# Altium PCB ACH512识别升级仪V1.2_20260608.PcbDoc (part 4 of 6)
Units mil, origin at the board's own origin, x right, y up, seen from the top; angles counter-clockwise.
Board outline 6141.73 x 5401.57 mil, 2 copper layers (Top Layer, Bottom Layer); 157 components, 111 nets, 548 pads, 222 vias.
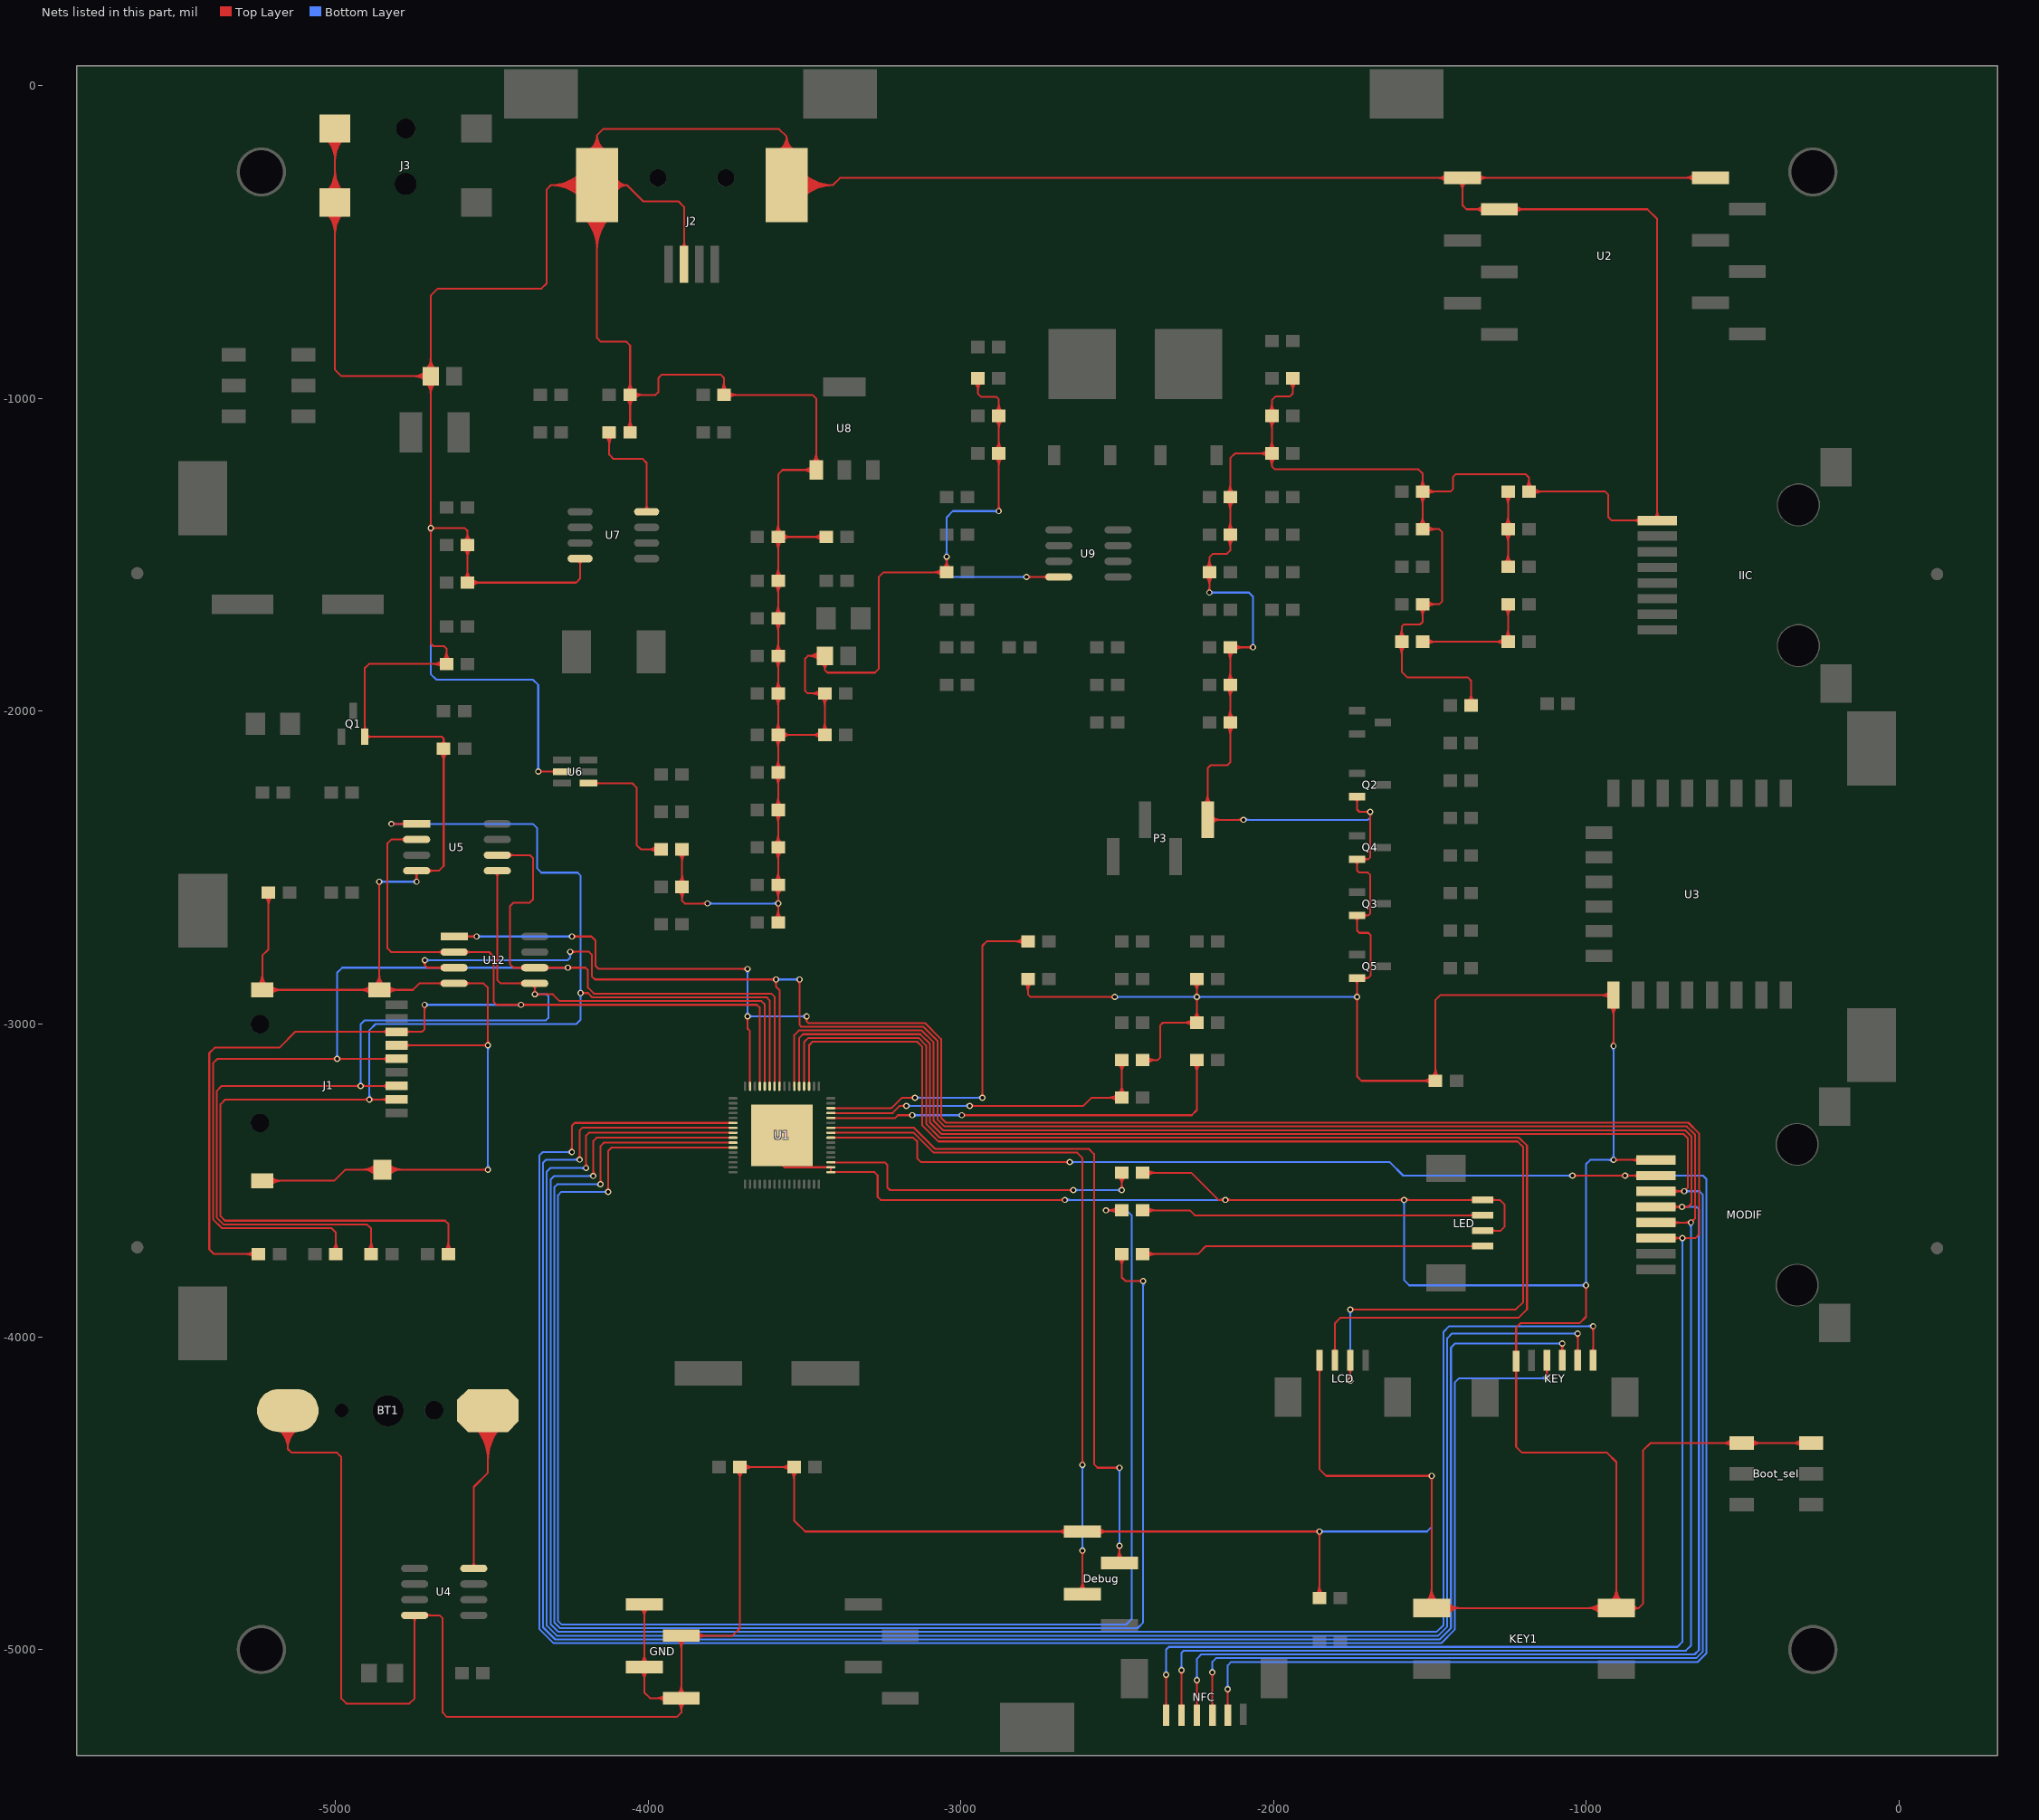
[diagram p4: the nets of this part, all layers, seen from the top]

## Via types
v1: diameter 19.68, hole 11.81, Top Layer to Bottom Layer, 222 vias

## Nets (pads, with @x,y where several pads share a name; then routed paths per layer and width w, separated by ;. In a path a pad name is that pad's centre, name@x,y a point inside that pad or via, vN(x,y) a via of type N, cw(c..) or ccw(c..) an arc to the next point about the centre after c; other vN are vias at no path point) (continued)
GND: (continued)
  Top Layer w6: KEY1.2@-850.44,-4856.27 ccw(c-832.59,-4847.86) -832.59,-4867.59 ; MODIF.8@-833.67,-3443.05 ccw(c-854.09,-3463.47) -854.09,-3434.59 ccw(c-854.09,-3405.71) MODIF.8@-833.67,-3426.13 ; IIC.8@-829.48,-1398.46 ccw(c-849.9,-1418.88) -849.9,-1390 ccw(c-849.9,-1361.12) IIC.8@-829.48,-1381.54 ; IIC.8@-781.84,-1381.54 ccw(c-802.26,-1361.12) -773.39,-1361.12 ccw(c-744.51,-1361.12) IIC.8@-764.93,-1381.54 ; U2.7@-654.41,-306.08 ccw(c-683.56,-335.23) -683.56,-294 ccw(c-683.56,-252.77) U2.7@-654.41,-281.92 ; U2.7@-650.16,-301.83 ccw(c-669.08,-320.75) -669.08,-294 ccw(c-669.08,-267.25) U2.7@-650.16,-286.17 ; Boot_sel.3@-533.17,-4352.93 ccw(c-565.02,-4384.77) -565.02,-4339.74 ccw(c-565.02,-4294.71) Boot_sel.3@-533.17,-4326.55 ; Boot_sel.3@-528.93,-4348.69 ccw(c-550.53,-4370.29) -550.53,-4339.74 ccw(c-550.53,-4309.19) Boot_sel.3@-528.93,-4330.79 ; Boot_sel.3@-477.57,-4348.69 cw(c-455.97,-4370.29) -455.97,-4339.74 cw(c-455.97,-4309.19) Boot_sel.3@-477.57,-4330.79 ; Boot_sel.3@-473.33,-4352.93 cw(c-441.48,-4384.77) -441.48,-4339.74 cw(c-441.48,-4294.71) Boot_sel.3@-473.33,-4326.55 ; Boot_sel.3@-310.73,-4352.93 ccw(c-342.58,-4384.77) -342.58,-4339.74 ccw(c-342.58,-4294.71) Boot_sel.3@-310.73,-4326.55 ; Boot_sel.3@-306.49,-4348.69 ccw(c-328.09,-4370.29) -328.09,-4339.74 ccw(c-328.09,-4309.19) Boot_sel.3@-306.49,-4330.79 ; Boot_sel.3@-280.81,-4339.74 Boot_sel.3@-503.25,-4339.74 -794.74,-4339.74 -819,-4364 -819,-4854 -832.59,-4867.59 ; -5151.87,-4358.53 -5139.81,-4370.59 -4994.81,-4370.59 -4980.81,-4384.59 -4980.81,-5156.59 -4964.81,-5172.59 -4762.81,-5172.59 -4746.3,-5156.08 U4.4@-4746.3,-4890.59 -4666.81,-4890.59 -4656.81,-4900.59 -4656.81,-5201.59 -4642.81,-5215.59 -3907.81,-5215.59 -3893.7,-5201.48 GND.4@-3893.7,-5155.59 ; v1(-4694.81,-1414.59) C15.2@-4694.81,-928.59 ; v1(-4694.81,-1414.59) -4694.81,-1783.19 -4686,-1792 -4652,-1792 -4644.27,-1799.73 R18.2@-4644.27,-1848.59 -4892.59,-1848.59 -4905.43,-1861.43 Q1.2@-4905.43,-2081.34 -4659.66,-2081.34 -4653.46,-2087.54 ; C15.2@-4694.81,-928.59 -4694.81,-671.59 -4671.81,-648.59 -4340.81,-648.59 -4323.81,-631.59 -4323.81,-331.59 -4310.01,-317.79 ; -4310.01,-317.79 J2.6@-4163.15,-317.79 ; J2.6@-4163.15,-317.79 -4067.61,-317.79 ; J2.6@-4163.15,-317.79 -4163.15,-806.25 -4150.81,-818.59 -4068.81,-818.59 -4057.35,-830.05 D3.2@-4057.35,-988.59 ; J2.6@-4163.15,-317.79 -4163.15,-157.93 ; -4163.15,-157.93 -4143.81,-138.59 -3580.81,-138.59 -3556.85,-162.55 ; D3.2@-4057.35,-988.59 -3975.81,-988.59 -3966.81,-979.59 -3966.81,-934.59 -3955.81,-923.59 -3767.81,-923.59 -3757.35,-934.05 R17.1@-3757.35,-988.59 -3473.81,-988.59 -3462.36,-1000.04 U8.1@-3462.36,-1228.46 -3569.68,-1228.46 -3583.81,-1242.59 C26.2@-3583.81,-1442.59 ; C4.1@-3583.81,-2075.59 C22.2@-3583.81,-1942.59 C23.2@-3583.81,-1822.59 C24.2@-3583.81,-1702.59 C25.2@-3583.81,-1582.59 C26.2@-3583.81,-1442.59 ; C4.1@-3583.81,-2075.59 C7.1@-3434.67,-2075.59 C6.1@-3434.67,-1942.59 -3489.81,-1942.59 -3497.81,-1934.59 -3497.81,-1831.59 -3488.81,-1822.59 ; -3556.85,-162.55 J2.5@-3556.85,-317.79 -3409.01,-317.79 ; -3488.81,-1822.59 C19.2@-3434.68,-1822.59 -3434.68,-1867.72 ; -3409.01,-317.79 -3386.22,-295 U2.1@-1395.98,-295 -1395.98,-382.42 -1383.4,-395 U2.2@-1277.87,-395 -804.4,-395 -773.39,-426.01 IIC.8@-773.39,-1390 -919.4,-1390 -929.81,-1379.59 -929.81,-1307.59 -939.81,-1297.59 C28.2@-1183.35,-1297.59 -1183.35,-1253.05 -1194.81,-1241.59 -1416.81,-1241.59 -1425.81,-1250.59 -1425.81,-1289.59 -1433.81,-1297.59 C30.2@-1523.35,-1297.59 ; C46.2@-2005.27,-1175.59 -2005.27,-1217.13 -1995.81,-1226.59 -1536.81,-1226.59 -1523.35,-1240.05 C30.2@-1523.35,-1297.59 ; KEY1.2@-903.96,-4867.59 -832.59,-4867.59
  Bottom Layer w6: v1(-4859.36,-2545) v1(-4740,-2545) ; v1@-4854.52,-2549.84 cw(c-4842.84,-2561.52) -4842.84,-2545 cw(c-4842.84,-2528.48) v1@-4854.52,-2540.16 ; v1@-4744.84,-2549.84 ccw(c-4756.52,-2561.52) -4756.52,-2545 ccw(c-4756.52,-2528.48) v1@-4744.84,-2540.16 ; v1@-4699.65,-1419.43 cw(c-4711.33,-1431.11) -4694.81,-1431.11 cw(c-4678.29,-1431.11) v1@-4689.97,-1419.43 ; v1(-4694.81,-1414.59) -4694.81,-1880.59 -4676.31,-1899.09 -4367.91,-1899.09 -4351.09,-1915.91 v1(-4351.09,-2192.91) ; v1@-4516.65,-3460.85 ccw(c-4528.33,-3449.17) -4511.81,-3449.17 ccw(c-4495.29,-3449.17) v1@-4506.97,-3460.85 ; v1@-4516.65,-3072.89 cw(c-4528.33,-3084.57) -4511.81,-3084.57 cw(c-4495.29,-3084.57) v1@-4506.97,-3072.89 ; v1(-4511.81,-3465.69) v1(-4511.81,-3068.05) ; v1@-4355.93,-2188.07 ccw(c-4367.61,-2176.39) -4351.09,-2176.39 ccw(c-4334.57,-2176.39) v1@-4346.25,-2188.07 ; v1(-3809.81,-2614.59) v1(-3583.81,-2614.59) ; v1@-3804.97,-2619.43 cw(c-3793.29,-2631.11) -3793.29,-2614.59 cw(c-3793.29,-2598.07) v1@-3804.97,-2609.75 ; v1@-3588.65,-2619.43 ccw(c-3600.33,-2631.11) -3600.33,-2614.59 ccw(c-3600.33,-2598.07) v1@-3588.65,-2609.75 ; v1@-3050.11,-1510.89 cw(c-3061.79,-1522.57) -3045.27,-1522.57 cw(c-3028.76,-1522.57) v1@-3040.44,-1510.89 ; v1@-3050.11,-1501.22 ccw(c-3061.79,-1489.54) -3045.27,-1489.54 ccw(c-3028.76,-1489.54) v1@-3040.44,-1501.22 ; v1@-2883.18,-1364.96 ccw(c-2894.86,-1376.64) -2894.86,-1360.13 ccw(c-2894.86,-1343.61) v1@-2883.18,-1355.29 ; v1(-2878.35,-1360.13) -3025.35,-1360.13 -3045.27,-1380.05 v1(-3045.27,-1506.05) -3045.27,-1560.13 -3034.81,-1570.59 v1(-2789.81,-1570.59) ; v1@-2794.65,-1575.43 ccw(c-2806.33,-1587.11) -2806.33,-1570.59 ccw(c-2806.33,-1554.07) v1@-2794.65,-1565.75 ; v1(-2667.07,-3562.33) v1(-2153.81,-3562.33) ; v1@-2662.23,-3567.17 cw(c-2650.55,-3578.85) -2650.55,-3562.33 cw(c-2650.55,-3545.81) v1@-2662.23,-3557.49 ; v1(-2507.81,-2913.59) v1(-2245.27,-2913.59) v1(-1733.15,-2913.59) ; v1@-2502.97,-2918.43 cw(c-2491.29,-2930.11) -2491.29,-2913.59 cw(c-2491.29,-2897.07) v1@-2502.97,-2908.75 ; v1@-2250.11,-2918.43 ccw(c-2261.79,-2930.11) -2261.79,-2913.59 ccw(c-2261.79,-2897.07) v1@-2250.11,-2908.75 ; v1@-2240.44,-2918.43 cw(c-2228.76,-2930.11) -2228.76,-2913.59 cw(c-2228.76,-2897.07) v1@-2240.44,-2908.75 ; v1(-2205.27,-1620.59) -2078.81,-1620.59 -2065.81,-1633.59 v1(-2065.81,-1795.59) ; v1@-2200.44,-1625.43 cw(c-2188.76,-1637.11) -2188.76,-1620.59 cw(c-2188.76,-1604.07) v1@-2200.44,-1615.75 ; v1@-2158.65,-3567.17 ccw(c-2170.33,-3578.85) -2170.33,-3562.33 ccw(c-2170.33,-3545.81) v1@-2158.65,-3557.49 ; v1(-2096.4,-2347) -1698.22,-2347 -1690.81,-2339.59 v1(-1690.81,-2321.59) ; v1@-2091.56,-2351.84 cw(c-2079.88,-2363.52) -2079.88,-2347 cw(c-2079.88,-2330.48) v1@-2091.56,-2342.16 ; v1@-2070.65,-1790.75 ccw(c-2082.33,-1779.07) -2065.81,-1779.07 ccw(c-2049.29,-1779.07) v1@-2060.97,-1790.75 ; v1(-1853.27,-4622.72) -1508.94,-4622.72 -1494.51,-4608.29 v1(-1494.51,-4444.59) ; v1@-1848.44,-4627.55 cw(c-1836.76,-4639.24) -1836.76,-4622.72 cw(c-1836.76,-4606.2) v1@-1848.44,-4617.88 ; v1@-1737.99,-2918.43 ccw(c-1749.67,-2930.11) -1749.67,-2913.59 ccw(c-1749.67,-2897.07) v1@-1737.99,-2908.75 ; v1@-1695.65,-2326.43 cw(c-1707.33,-2338.11) -1690.81,-2338.11 cw(c-1674.29,-2338.11) v1@-1685.97,-2326.43 ; v1@-1587.65,-3567.17 cw(c-1599.33,-3578.85) -1582.81,-3578.85 cw(c-1566.29,-3578.85) v1@-1577.97,-3567.17 ; v1(-1582.81,-3562.33) -1582.81,-3818.59 -1565.81,-3835.59 v1(-1001,-3835.59) -1001,-3448 -987.59,-3434.59 v1(-913.23,-3434.59) v1(-913.23,-3070.17) ; v1@-1499.35,-4449.43 cw(c-1511.03,-4461.11) -1494.51,-4461.11 cw(c-1477.99,-4461.11) v1@-1489.67,-4449.43 ; v1@-1005.84,-3840.43 ccw(c-1017.52,-3852.11) -1017.52,-3835.59 ccw(c-1017.52,-3819.07) -1005.84,-3830.75 ccw(c-1017.52,-3819.07) -1001,-3819.07 ccw(c-984.48,-3819.07) v1@-996.16,-3830.75 ; v1@-918.07,-3439.43 ccw(c-929.75,-3451.11) -929.75,-3434.59 ccw(c-929.75,-3418.07) -918.07,-3429.75 ccw(c-929.75,-3418.07) -913.23,-3418.07 ccw(c-896.71,-3418.07) v1@-908.39,-3429.75 ; v1@-918.07,-3075.01 cw(c-929.75,-3086.69) -913.23,-3086.69 cw(c-896.71,-3086.69) v1@-908.39,-3075.01
I2C_SCL: C27.2 R20.1 R22.1 | length 808.2
  Top Layer w6: C27.2@-1523.35,-1777.59 R20.1@-1250.27,-1777.59 R22.1@-1250.27,-1657.59 ; C27.2@-1513.82,-1785.15 cw(c-1495.58,-1803.39) -1495.58,-1777.59 cw(c-1495.58,-1751.79) C27.2@-1513.82,-1770.03 ; C27.2@-1509.58,-1789.39 cw(c-1481.1,-1817.87) -1481.1,-1777.59 cw(c-1481.1,-1737.31) C27.2@-1509.58,-1765.79 ; R20.1@-1264.04,-1789.39 ccw(c-1292.52,-1817.87) -1292.52,-1777.59 ccw(c-1292.52,-1737.31) R20.1@-1264.04,-1765.79 ; R20.1@-1262.07,-1765.79 ccw(c-1290.56,-1737.31) -1250.27,-1737.31 ccw(c-1209.99,-1737.31) R20.1@-1238.48,-1765.79 ; R22.1@-1262.07,-1669.39 cw(c-1290.56,-1697.87) -1250.27,-1697.87 cw(c-1209.99,-1697.87) R22.1@-1238.48,-1669.39 ; R20.1@-1259.8,-1785.15 ccw(c-1278.04,-1803.39) -1278.04,-1777.59 ccw(c-1278.04,-1751.79) R20.1@-1259.8,-1770.03 ; R20.1@-1257.83,-1770.03 ccw(c-1276.07,-1751.79) -1250.27,-1751.79 ccw(c-1224.48,-1751.79) R20.1@-1242.72,-1770.03 ; R22.1@-1257.83,-1665.15 cw(c-1276.07,-1683.39) -1250.27,-1683.39 cw(c-1224.48,-1683.39) R22.1@-1242.72,-1665.15
I2C_SDA: C28.1 R21.1 R23.2 | length 655.2
  Top Layer w6: R23.2@-1262.07,-1525.79 ccw(c-1290.56,-1497.31) -1250.27,-1497.31 ccw(c-1209.99,-1497.31) R23.2@-1238.48,-1525.79 ; R21.1@-1262.07,-1429.39 cw(c-1290.56,-1457.87) -1250.27,-1457.87 cw(c-1209.99,-1457.87) R21.1@-1238.48,-1429.39 ; R21.1@-1262.07,-1405.79 ccw(c-1290.56,-1377.31) -1250.27,-1377.31 ccw(c-1209.99,-1377.31) R21.1@-1238.48,-1405.79 ; C28.1@-1262.07,-1309.39 cw(c-1290.56,-1337.87) -1250.27,-1337.87 cw(c-1209.99,-1337.87) C28.1@-1238.48,-1309.39 ; R23.2@-1257.83,-1530.03 ccw(c-1276.07,-1511.79) -1250.27,-1511.79 ccw(c-1224.48,-1511.79) R23.2@-1242.72,-1530.03 ; R21.1@-1257.83,-1425.15 cw(c-1276.07,-1443.39) -1250.27,-1443.39 cw(c-1224.48,-1443.39) R21.1@-1242.72,-1425.15 ; R21.1@-1257.83,-1410.03 ccw(c-1276.07,-1391.79) -1250.27,-1391.79 ccw(c-1224.48,-1391.79) R21.1@-1242.72,-1410.03 ; C28.1@-1257.83,-1305.15 cw(c-1276.07,-1323.39) -1250.27,-1323.39 cw(c-1224.48,-1323.39) C28.1@-1242.72,-1305.15 ; R23.2@-1250.27,-1537.59 R21.1@-1250.27,-1417.59 C28.1@-1250.27,-1297.59
KEY1: KEY.4 U1.6 | length 6469
  Top Layer w6: v1@-4248.65,-3404.75 ccw(c-4260.33,-3393.07) -4243.81,-3393.07 ccw(c-4227.29,-3393.07) v1@-4238.97,-3404.75 ; v1(-4243.81,-3409.59) -4243.81,-3325.59 -4234.44,-3316.22 U1.6@-3728.31,-3316.22 ; KEY.4@-1131.46,-4103.59 cw(c-1144.49,-4116.61) -1126.07,-4116.61 cw(c-1107.65,-4116.61) KEY.4@-1120.67,-4103.59 ; v1@-1130.91,-4127.49 ccw(c-1142.59,-4115.81) -1126.07,-4115.81 ccw(c-1109.55,-4115.81) v1@-1121.23,-4127.49 ; v1(-1126.07,-4132.33) KEY.4@-1126.07,-4075.36
  Bottom Layer w6: v1@-4248.65,-3414.43 ccw(c-4260.33,-3426.11) -4260.33,-3409.59 ccw(c-4260.33,-3393.07) v1@-4248.65,-3404.75 ; v1(-4243.81,-3409.59) -4336.81,-3409.59 -4347.81,-3420.59 -4347.81,-4933.47 -4301.69,-4979.59 -1463.9,-4979.59 -1420.81,-4936.5 -1420.81,-4146.59 -1406.55,-4132.33 v1(-1126.07,-4132.33) ; v1@-1130.91,-4137.17 ccw(c-1142.59,-4148.85) -1142.59,-4132.33 ccw(c-1142.59,-4115.81) v1@-1130.91,-4127.49
KEY2: KEY.3 U1.7 | length 6572.1
  Top Layer w6: v1@-4223.65,-3428.75 ccw(c-4235.33,-3417.07) -4218.81,-3417.07 ccw(c-4202.29,-3417.07) v1@-4213.97,-3428.75 ; v1(-4218.81,-3433.59) -4218.81,-3340.59 -4210.19,-3331.97 U1.7@-3728.31,-3331.97 ; KEY.3@-1082.22,-4047.13 ccw(c-1095.24,-4034.11) -1076.82,-4034.11 ccw(c-1058.4,-4034.11) KEY.3@-1071.42,-4047.13 ; v1@-1081.66,-4026.43 cw(c-1093.34,-4038.11) -1076.82,-4038.11 cw(c-1060.3,-4038.11) v1@-1071.98,-4026.43 ; KEY.3@-1076.82,-4075.36 v1(-1076.82,-4021.59)
  Bottom Layer w6: v1@-4223.65,-3438.43 ccw(c-4235.33,-3450.11) -4235.33,-3433.59 ccw(c-4235.33,-3417.07) v1@-4223.65,-3428.75 ; v1(-4218.81,-3433.59) -4325.81,-3433.59 -4335.81,-3443.59 -4335.81,-4928.5 -4296.72,-4967.59 -1468.87,-4967.59 -1432.81,-4931.53 -1432.81,-4034.59 -1419.81,-4021.59 v1(-1076.82,-4021.59) ; v1@-1081.66,-4026.43 ccw(c-1093.34,-4038.11) -1093.34,-4021.59 ccw(c-1093.34,-4005.07) v1@-1081.66,-4016.75
KEY3: KEY.2 U1.8 | length 6627.9
  Top Layer w6: v1@-4202.65,-3455.75 ccw(c-4214.33,-3444.07) -4197.81,-3444.07 ccw(c-4181.29,-3444.07) v1@-4192.97,-3455.75 ; v1(-4197.81,-3460.59) -4197.81,-3356.59 -4188.94,-3347.72 U1.8@-3728.31,-3347.72 ; KEY.2@-1032.97,-4047.13 ccw(c-1045.99,-4034.11) -1027.57,-4034.11 ccw(c-1009.15,-4034.11) KEY.2@-1022.17,-4047.13 ; v1@-1032.41,-3994.43 cw(c-1044.09,-4006.11) -1027.57,-4006.11 cw(c-1011.05,-4006.11) v1@-1022.73,-3994.43 ; KEY.2@-1027.57,-4075.36 v1(-1027.57,-3989.59)
  Bottom Layer w6: v1@-4202.65,-3465.43 ccw(c-4214.33,-3477.11) -4214.33,-3460.59 ccw(c-4214.33,-3444.07) v1@-4202.65,-3455.75 ; v1(-4197.81,-3460.59) -4312.81,-3460.59 -4323.81,-3471.59 -4323.81,-4923.53 -4291.75,-4955.59 -1473.84,-4955.59 -1444.81,-4926.56 -1444.81,-4004.59 -1429.81,-3989.59 v1(-1027.57,-3989.59) ; v1@-1032.41,-3994.43 ccw(c-1044.09,-4006.11) -1044.09,-3989.59 ccw(c-1044.09,-3973.07) v1@-1032.41,-3984.75
KEY4: KEY.1 U1.9 | length 6665.3
  Top Layer w6: v1@-4179.65,-3480.75 ccw(c-4191.33,-3469.07) -4174.81,-3469.07 ccw(c-4158.29,-3469.07) v1@-4169.97,-3480.75 ; v1(-4174.81,-3485.59) -4174.81,-3373.59 -4164.68,-3363.46 U1.9@-3728.31,-3363.46 ; KEY.1@-983.72,-4047.13 ccw(c-996.74,-4034.11) -978.32,-4034.11 ccw(c-959.9,-4034.11) KEY.1@-972.93,-4047.13 ; v1@-983.16,-3970.92 cw(c-994.84,-3982.6) -978.32,-3982.6 cw(c-961.8,-3982.6) v1@-973.48,-3970.92 ; KEY.1@-978.32,-4075.36 v1(-978.32,-3966.08)
  Bottom Layer w6: v1@-4179.65,-3490.43 ccw(c-4191.33,-3502.11) -4191.33,-3485.59 ccw(c-4191.33,-3469.07) v1@-4179.65,-3480.75 ; v1(-4174.81,-3485.59) -4299.81,-3485.59 -4311.81,-3497.59 -4311.81,-4918.56 -4286.78,-4943.59 -1478.81,-4943.59 -1456.81,-4921.59 -1456.81,-3984.59 -1438.3,-3966.08 v1(-978.32,-3966.08) ; v1@-983.16,-3970.92 ccw(c-994.84,-3982.6) -994.84,-3966.08 ccw(c-994.84,-3949.56) v1@-983.16,-3961.24
LCD_UARTA_RX: LCD.3 U1.52 | length 4051.5
  Top Layer w6: U1.52@-3500.94,-3199.09 -3500.94,-3057.72 -3487.81,-3044.59 -3134.69,-3044.59 -3110.81,-3068.47 -3110.81,-3319.56 -3066.91,-3363.46 -1214.97,-3363.46 -1189.81,-3388.62 -1189.81,-3912.59 -1216.81,-3939.59 -1786.81,-3939.59 -1804.01,-3956.79 LCD.3@-1804.01,-4075.36 ; LCD.3@-1809.41,-4047.13 ccw(c-1822.43,-4034.11) -1804.01,-4034.11 ccw(c-1785.59,-4034.11) LCD.3@-1798.61,-4047.13
LCD_UARTA_TX: LCD.2 U1.51 | length 4189.8
  Top Layer w6: U1.51@-3485.2,-3199.09 -3485.2,-3067.98 -3473.81,-3056.59 -3139.66,-3056.59 -3122.81,-3073.44 -3122.81,-3324.53 -3071.88,-3375.46 -1219.94,-3375.46 -1201.81,-3393.59 -1201.81,-3888.59 -1225.81,-3912.59 v1(-1754.76,-3912.59) ; LCD.2@-1760.16,-4103.59 cw(c-1773.18,-4116.61) -1754.76,-4116.61 cw(c-1736.34,-4116.61) LCD.2@-1749.36,-4103.59 ; v1@-1759.6,-4135.8 ccw(c-1771.28,-4124.12) -1754.76,-4124.12 ccw(c-1738.24,-4124.12) v1@-1749.92,-4135.8 ; v1(-1754.76,-4140.64) LCD.2@-1754.76,-4075.36 ; v1@-1749.92,-3917.43 cw(c-1738.24,-3929.11) -1738.24,-3912.59 cw(c-1738.24,-3896.07) v1@-1749.92,-3907.75
  Bottom Layer w6: v1@-1759.6,-4135.8 ccw(c-1771.28,-4124.12) -1754.76,-4124.12 ccw(c-1738.24,-4124.12) v1@-1749.92,-4135.8 ; v1@-1759.6,-3917.43 cw(c-1771.28,-3929.11) -1754.76,-3929.11 cw(c-1738.24,-3929.11) v1@-1749.92,-3917.43 ; v1(-1754.76,-4140.64) v1@-1754.76,-3912.64
LED1: R5.1 U1.10 | length 5439.8
  Top Layer w6: v1@-4156.65,-3507.75 ccw(c-4168.33,-3496.07) -4151.81,-3496.07 ccw(c-4135.29,-3496.07) v1@-4146.97,-3507.75 ; v1(-4151.81,-3512.59) -4151.81,-3389.59 -4141.43,-3379.21 U1.10@-3728.31,-3379.21 ; R5.1@-2497.07,-3747.39 cw(c-2525.56,-3775.87) -2485.27,-3775.87 cw(c-2444.99,-3775.87) R5.1@-2473.48,-3747.39 ; R5.1@-2492.83,-3743.15 cw(c-2511.07,-3761.39) -2485.27,-3761.39 cw(c-2459.48,-3761.39) R5.1@-2477.72,-3743.15 ; R5.1@-2485.27,-3735.59 -2485.27,-3810.13 -2473.81,-3821.59 v1(-2416.81,-3821.59) ; v1@-2421.65,-3826.43 ccw(c-2433.33,-3838.11) -2433.33,-3821.59 ccw(c-2433.33,-3805.07) v1@-2421.65,-3816.75
  Bottom Layer w6: v1@-4156.65,-3517.43 ccw(c-4168.33,-3529.11) -4168.33,-3512.59 ccw(c-4168.33,-3496.07) v1@-4156.65,-3507.75 ; v1(-4151.81,-3512.59) -4290.81,-3512.59 -4299.81,-3521.59 -4299.81,-4913.59 -4281.81,-4931.59 -2434.81,-4931.59 -2416.81,-4913.59 v1(-2416.81,-3821.59) ; v1@-2421.65,-3826.43 cw(c-2433.33,-3838.11) -2416.81,-3838.11 cw(c-2400.29,-3838.11) v1@-2411.97,-3826.43
LED2: R6.1 U1.11 | length 5543.2
  Top Layer w6: v1@-4132.65,-3531.75 ccw(c-4144.33,-3520.07) -4127.81,-3520.07 ccw(c-4111.29,-3520.07) v1@-4122.97,-3531.75 ; v1(-4127.81,-3536.59) -4127.81,-3406.59 -4116.18,-3394.96 U1.11@-3728.31,-3394.96 ; v1(-2535.81,-3595.59) R6.1@-2485.27,-3595.59 ; v1@-2530.97,-3600.43 cw(c-2519.29,-3612.11) -2519.29,-3595.59 cw(c-2519.29,-3579.07) v1@-2530.97,-3590.75 ; R6.1@-2499.04,-3607.39 ccw(c-2527.52,-3635.87) -2527.52,-3595.59 ccw(c-2527.52,-3555.31) R6.1@-2499.04,-3583.79 ; R6.1@-2494.8,-3603.15 ccw(c-2513.04,-3621.39) -2513.04,-3595.59 ccw(c-2513.04,-3569.79) R6.1@-2494.8,-3588.03
  Bottom Layer w6: v1@-4132.65,-3541.43 ccw(c-4144.33,-3553.11) -4144.33,-3536.59 ccw(c-4144.33,-3520.07) v1@-4132.65,-3531.75 ; v1(-4127.81,-3536.59) -4276.81,-3536.59 -4287.81,-3547.59 -4287.81,-4908.62 -4276.84,-4919.59 -2499,-4919.59 -2470.81,-4919.59 -2453.81,-4902.59 -2453.81,-3611.59 -2469.81,-3595.59 v1(-2535.81,-3595.59) ; v1@-2530.97,-3600.43 cw(c-2519.29,-3612.11) -2519.29,-3595.59 cw(c-2519.29,-3579.07) v1@-2530.97,-3590.75
LED_GREED: LED.1 R5.2 | length 1230.1
  Top Layer w6: R5.2@-2418.35,-3735.59 -2241.81,-3735.59 -2216.3,-3710.08 LED.1@-1331.58,-3710.08 ; R5.2@-2408.82,-3743.15 cw(c-2390.58,-3761.39) -2390.58,-3735.59 cw(c-2390.58,-3709.79) R5.2@-2408.82,-3728.03 ; R5.2@-2404.58,-3747.39 cw(c-2376.1,-3775.87) -2376.1,-3735.59 cw(c-2376.1,-3695.31) R5.2@-2404.58,-3723.79 ; LED.1@-1359.81,-3715.47 ccw(c-1372.83,-3728.5) -1372.83,-3710.08 ccw(c-1372.83,-3691.66) LED.1@-1359.81,-3704.68
LED_RED: LED.3 R6.2 | length 1226.1
  Top Layer w6: R6.2@-2418.35,-3595.59 -2267.81,-3595.59 -2251.82,-3611.58 LED.3@-1331.58,-3611.58 ; R6.2@-2408.82,-3603.15 cw(c-2390.58,-3621.39) -2390.58,-3595.59 cw(c-2390.58,-3569.79) R6.2@-2408.82,-3588.03 ; R6.2@-2404.58,-3607.39 cw(c-2376.1,-3635.87) -2376.1,-3595.59 cw(c-2376.1,-3555.31) R6.2@-2404.58,-3583.79 ; LED.3@-1359.81,-3616.98 ccw(c-1372.83,-3630) -1372.83,-3611.58 ccw(c-1372.83,-3593.16) LED.3@-1359.81,-3606.18
MCU_SWCLK: Debug.3 U1.42 | length 2468.4
  Top Layer w6: U1.42@-3415.31,-3331.97 -3149.31,-3331.97 -3081.82,-3399.46 -2589.94,-3399.46 -2573.81,-3415.59 -2573.81,-4407.59 -2562.81,-4418.59 v1(-2492.81,-4418.59) ; Debug.3@-2504.89,-4710.64 ccw(c-2534.04,-4681.48) -2492.81,-4681.48 ccw(c-2451.58,-4681.48) Debug.3@-2480.73,-4710.64 ; Debug.3@-2500.64,-4714.88 ccw(c-2519.56,-4695.97) -2492.81,-4695.97 ccw(c-2466.06,-4695.97) Debug.3@-2484.98,-4714.88 ; v1@-2497.65,-4673.43 cw(c-2509.33,-4685.11) -2492.81,-4685.11 cw(c-2476.29,-4685.11) v1@-2487.97,-4673.43 ; v1@-2497.65,-4423.43 ccw(c-2509.33,-4435.11) -2509.33,-4418.59 ccw(c-2509.33,-4402.07) v1@-2497.65,-4413.75 ; Debug.3@-2492.81,-4722.72 v1(-2492.81,-4668.59)
  Bottom Layer w6: v1@-2497.65,-4663.75 ccw(c-2509.33,-4652.07) -2492.81,-4652.07 ccw(c-2476.29,-4652.07) v1@-2487.97,-4663.75 ; v1@-2497.65,-4423.43 cw(c-2509.33,-4435.11) -2492.81,-4435.11 cw(c-2476.29,-4435.11) v1@-2487.97,-4423.43 ; v1(-2492.81,-4668.59) v1(-2492.81,-4418.59)
MCU_SWDIO: Debug.2 U1.41 | length 2442.7
  Top Layer w6: U1.41@-3415.31,-3347.72 -3150.54,-3347.72 -3086.79,-3411.46 -2627.94,-3411.46 -2610.92,-3428.48 v1(-2610.92,-4409.7) ; Debug.2@-2623,-4810.64 ccw(c-2652.15,-4781.48) -2610.92,-4781.48 ccw(c-2569.69,-4781.48) Debug.2@-2598.84,-4810.64 ; Debug.2@-2618.75,-4814.88 ccw(c-2637.67,-4795.97) -2610.92,-4795.97 ccw(c-2584.17,-4795.97) Debug.2@-2603.09,-4814.88 ; v1@-2615.76,-4688.54 cw(c-2627.44,-4700.22) -2610.92,-4700.22 cw(c-2594.4,-4700.22) v1@-2606.08,-4688.54 ; v1@-2615.76,-4404.86 ccw(c-2627.44,-4393.18) -2610.92,-4393.18 ccw(c-2594.4,-4393.18) v1@-2606.08,-4404.86 ; Debug.2@-2610.92,-4822.72 v1(-2610.92,-4683.7)
  Bottom Layer w6: v1@-2615.76,-4678.86 ccw(c-2627.44,-4667.18) -2610.92,-4667.18 ccw(c-2594.4,-4667.18) v1@-2606.08,-4678.86 ; v1@-2615.76,-4414.54 cw(c-2627.44,-4426.22) -2610.92,-4426.22 cw(c-2594.4,-4426.22) v1@-2606.08,-4414.54 ; v1(-2610.92,-4683.7) v1(-2610.92,-4409.7)
MICRO_SD_CLK: J1.5 R3.1 U1.58 U5.6 U12.6 | length 4717.9
  Top Layer w6: R3.1@-5010.14,-3723.79 ccw(c-5038.63,-3695.31) -4998.35,-3695.31 ccw(c-4958.06,-3695.31) R3.1@-4986.55,-3723.79 ; R3.1@-5005.9,-3728.03 ccw(c-5024.14,-3709.79) -4998.35,-3709.79 ccw(c-4972.55,-3709.79) R3.1@-4990.79,-3728.03 ; v1@-4998.84,-3116.2 ccw(c-5010.52,-3127.88) -5010.52,-3111.36 ccw(c-5010.52,-3094.84) v1@-4998.84,-3106.52 ; R3.1@-4998.35,-3735.59 -4998.35,-3666.05 -5011.81,-3652.59 -5362.81,-3652.59 -5390.81,-3624.59 -5390.81,-3125.59 -5376.58,-3111.36 v1(-4994,-3111.36) J1.5@-4804.24,-3111.36 ; v1@-4989.16,-3116.2 cw(c-4977.48,-3127.88) -4977.48,-3111.36 cw(c-4977.48,-3094.84) v1@-4989.16,-3106.52 ; J1.5@-4833.52,-3118.98 ccw(c-4851.92,-3137.39) -4851.92,-3111.36 ccw(c-4851.92,-3085.33) J1.5@-4833.52,-3103.74 ; U5.6@-4482.13,-2460 -4377.81,-2460 -4367.81,-2470 -4367.81,-2601.81 -4378,-2612 -4430,-2612 -4442,-2624 -4442,-2808 -4430,-2820 U12.6@-4362.13,-2820 v1(-4256,-2820) -4200,-2820 -4192,-2828 -4192,-2884 -4173.41,-2902.59 -3605.81,-2902.59 -3595.43,-2912.97 U1.58@-3595.43,-3199.09 ; U5.6@-4444.4,-2466.23 cw(c-4429.36,-2481.27) -4429.36,-2460 cw(c-4429.36,-2438.73) U5.6@-4444.4,-2453.77 ; U12.6@-4399.85,-2826.23 ccw(c-4414.89,-2841.27) -4414.89,-2820 ccw(c-4414.89,-2798.73) U12.6@-4399.85,-2813.77 ; U12.6@-4324.4,-2826.23 cw(c-4309.36,-2841.27) -4309.36,-2820 cw(c-4309.36,-2798.73) U12.6@-4324.4,-2813.77 ; v1@-4260.84,-2824.84 ccw(c-4272.52,-2836.52) -4272.52,-2820 ccw(c-4272.52,-2803.48) v1@-4260.84,-2815.16 ; v1@-4251.16,-2824.84 cw(c-4239.48,-2836.52) -4239.48,-2820 cw(c-4239.48,-2803.48) v1@-4251.16,-2815.16
  Bottom Layer w6: v1@-4998.84,-3106.52 ccw(c-5010.52,-3094.84) -4994,-3094.84 ccw(c-4977.48,-3094.84) v1@-4989.16,-3106.52 ; v1(-4994,-3111.36) -4994,-2836 -4978,-2820 v1(-4256,-2820) ; v1@-4260.84,-2824.84 ccw(c-4272.52,-2836.52) -4272.52,-2820 ccw(c-4272.52,-2803.48) v1@-4260.84,-2815.16
MICRO_SD_CS: J1.2 R1.1 U1.59 U5.1 | length 5238.8
  Top Layer w6: v1@-4895.65,-3246.12 ccw(c-4907.33,-3257.8) -4907.33,-3241.28 ccw(c-4907.33,-3224.76) v1@-4895.65,-3236.44 ; v1@-4885.97,-3246.12 cw(c-4874.29,-3257.8) -4874.29,-3241.28 cw(c-4874.29,-3224.76) v1@-4885.97,-3236.44 ; J1.2@-4833.52,-3248.9 ccw(c-4851.92,-3267.31) -4851.92,-3241.28 ccw(c-4851.92,-3215.25) J1.2@-4833.52,-3233.66 ; v1(-4821,-2360) U5.1@-4740,-2360 ; v1@-4816.16,-2364.84 cw(c-4804.48,-2376.52) -4804.48,-2360 cw(c-4804.48,-2343.48) v1@-4816.16,-2355.16 ; J1.2@-4804.24,-3241.28 v1(-4890.81,-3241.28) -5351.5,-3241.28 -5366.81,-3256.59 -5366.81,-3614.65 -5352.87,-3628.59 -4648.81,-3628.59 -4638.35,-3639.05 R1.1@-4638.35,-3735.59 ; U5.1@-4777.73,-2366.23 ccw(c-4792.77,-2381.27) -4792.77,-2360 ccw(c-4792.77,-2338.73) U5.1@-4777.73,-2353.77 ; R1.1@-4650.14,-3723.79 ccw(c-4678.63,-3695.31) -4638.35,-3695.31 ccw(c-4598.06,-3695.31) R1.1@-4626.55,-3723.79 ; R1.1@-4645.9,-3728.03 ccw(c-4664.14,-3709.79) -4638.35,-3709.79 ccw(c-4612.55,-3709.79) R1.1@-4630.79,-3728.03 ; v1(-4216,-2901) -4191.97,-2901 -4178.38,-2914.59 -3620.81,-2914.59 -3611.18,-2924.22 U1.59@-3611.18,-3199.09 ; v1@-4211.16,-2905.84 cw(c-4199.48,-2917.52) -4199.48,-2901 cw(c-4199.48,-2884.48) v1@-4211.16,-2896.16
  Bottom Layer w6: v1@-4895.65,-3236.44 ccw(c-4907.33,-3224.76) -4890.81,-3224.76 ccw(c-4874.29,-3224.76) v1@-4885.97,-3236.44 ; v1(-4890.81,-3241.28) -4890.81,-3019.81 -4871,-3000 -4229,-3000 -4216,-2987 v1(-4216,-2901) -4216,-2525 -4225,-2516 -4341,-2516 -4355,-2502 -4355,-2373 -4368,-2360 v1(-4821,-2360) ; v1@-4816.16,-2364.84 cw(c-4804.48,-2376.52) -4804.48,-2360 cw(c-4804.48,-2343.48) v1@-4816.16,-2355.16 ; v1@-4220.84,-2905.84 cw(c-4232.52,-2917.52) -4216,-2917.52 cw(c-4199.48,-2917.52) v1@-4211.16,-2905.84 ; v1@-4220.84,-2896.16 ccw(c-4232.52,-2884.48) -4216,-2884.48 ccw(c-4199.48,-2884.48) v1@-4211.16,-2896.16
MICRO_SD_MISO: J1.7 R4.1 U1.61 U5.2 U12.2 | length 4352.7
  Top Layer w6: R4.1@-5259.04,-3747.39 ccw(c-5287.52,-3775.87) -5287.52,-3735.59 ccw(c-5287.52,-3695.31) R4.1@-5259.04,-3723.79 ; R4.1@-5254.8,-3743.15 ccw(c-5273.04,-3761.39) -5273.04,-3735.59 ccw(c-5273.04,-3709.79) R4.1@-5254.8,-3728.03 ; R4.1@-5245.27,-3735.59 -5387.81,-3735.59 -5402.81,-3720.59 -5402.81,-3092.59 -5385.81,-3075.59 -5178.81,-3075.59 -5127.97,-3024.75 J1.7@-4804.24,-3024.75 -4722.75,-3024.75 -4714.41,-3016.41 v1(-4714.41,-2938.59) ; J1.7@-4833.52,-3032.37 ccw(c-4851.92,-3050.78) -4851.92,-3024.75 ccw(c-4851.92,-2998.72) J1.7@-4833.52,-3017.13 ; U5.2@-4777.73,-2416.23 ccw(c-4792.77,-2431.27) -4792.77,-2410 ccw(c-4792.77,-2388.73) U5.2@-4777.73,-2403.77 ; J1.7@-4774.96,-3032.37 cw(c-4756.56,-3050.78) -4756.56,-3024.75 cw(c-4756.56,-2998.72) J1.7@-4774.96,-3017.13 ; U5.2@-4740,-2410 -4821,-2410 -4833,-2422 -4833,-2758 -4821,-2770 U12.2@-4620,-2770 -4508,-2770 -4494.13,-2783.87 -4494.13,-2928.87 -4484.41,-2938.59 v1(-4406,-2938.59) -3651.81,-2938.59 -3642.68,-2947.72 U1.61@-3642.68,-3199.09 ; v1@-4719.25,-2943.43 cw(c-4730.93,-2955.11) -4714.41,-2955.11 cw(c-4697.89,-2955.11) v1@-4709.57,-2943.43 ; U12.2@-4657.73,-2776.23 ccw(c-4672.77,-2791.27) -4672.77,-2770 ccw(c-4672.77,-2748.73) U12.2@-4657.73,-2763.77 ; U12.2@-4582.27,-2776.23 cw(c-4567.23,-2791.27) -4567.23,-2770 cw(c-4567.23,-2748.73) U12.2@-4582.27,-2763.77 ; v1@-4410.84,-2943.43 ccw(c-4422.52,-2955.11) -4422.52,-2938.59 ccw(c-4422.52,-2922.07) v1@-4410.84,-2933.75 ; v1@-4401.16,-2943.43 cw(c-4389.48,-2955.11) -4389.48,-2938.59 cw(c-4389.48,-2922.07) v1@-4401.16,-2933.75
  Bottom Layer w6: v1(-4714.41,-2938.59) v1(-4406,-2938.59) ; v1@-4709.57,-2943.43 cw(c-4697.89,-2955.11) -4697.89,-2938.59 cw(c-4697.89,-2922.07) v1@-4709.57,-2933.75 ; v1@-4410.84,-2943.43 ccw(c-4422.52,-2955.11) -4422.52,-2938.59 ccw(c-4422.52,-2922.07) v1@-4410.84,-2933.75
MICRO_SD_MOSI: J1.3 R2.1 U1.60 U5.5 U12.5 | length 4416.6
  Top Layer w6: v1@-4923.84,-3202.82 ccw(c-4935.52,-3214.5) -4935.52,-3197.98 ccw(c-4935.52,-3181.46) v1@-4923.84,-3193.14 ; v1@-4914.16,-3202.82 cw(c-4902.48,-3214.5) -4902.48,-3197.98 cw(c-4902.48,-3181.46) v1@-4914.16,-3193.14 ; R2.1@-4897.07,-3723.79 ccw(c-4925.56,-3695.31) -4885.27,-3695.31 ccw(c-4844.99,-3695.31) R2.1@-4873.48,-3723.79 ; R2.1@-4892.83,-3728.03 ccw(c-4911.07,-3709.79) -4885.27,-3709.79 ccw(c-4859.48,-3709.79) R2.1@-4877.72,-3728.03 ; R2.1@-4885.27,-3735.59 -4885.27,-3654.13 -4898.81,-3640.59 -5357.84,-3640.59 -5378.81,-3619.62 -5378.81,-3213.59 -5363.2,-3197.98 v1(-4919,-3197.98) J1.3@-4804.24,-3197.98 ; J1.3@-4833.52,-3205.6 ccw(c-4851.92,-3224.01) -4851.92,-3197.98 ccw(c-4851.92,-3171.95) J1.3@-4833.52,-3190.36 ; U5.5@-4488.36,-2516.23 cw(c-4503.4,-2531.27) -4482.13,-2531.27 cw(c-4460.85,-2531.27) U5.5@-4475.9,-2516.23 ; U5.5@-4482.13,-2510 -4482.13,-2858.87 -4471,-2870 U12.5@-4362.13,-2870 v1(-4362.13,-2905) -4304.59,-2905 -4283,-2926.59 -3637.81,-2926.59 -3626.93,-2937.47 U1.60@-3626.93,-3199.09 ; U12.5@-4399.85,-2876.23 ccw(c-4414.89,-2891.27) -4414.89,-2870 ccw(c-4414.89,-2848.73) U12.5@-4399.85,-2863.77 ; U12.5@-4368.36,-2876.23 cw(c-4383.4,-2891.27) -4362.13,-2891.27 cw(c-4340.85,-2891.27) U12.5@-4355.9,-2876.23 ; v1@-4366.96,-2900.16 ccw(c-4378.65,-2888.48) -4362.13,-2888.48 ccw(c-4345.61,-2888.48) -4357.29,-2900.16 ccw(c-4345.61,-2888.48) -4345.61,-2905 ccw(c-4345.61,-2921.52) v1@-4357.29,-2909.84
  Bottom Layer w6: v1@-4923.84,-3193.14 ccw(c-4935.52,-3181.46) -4919,-3181.46 ccw(c-4902.48,-3181.46) v1@-4914.16,-3193.14 ; v1(-4919,-3197.98) -4919,-3001 -4906,-2988 -4326,-2988 -4319,-2981 -4319,-2911 -4325,-2905 v1(-4362.13,-2905) ; v1@-4357.29,-2909.84 cw(c-4345.61,-2921.52) -4345.61,-2905 cw(c-4345.61,-2888.48) v1@-4357.29,-2900.16
MODIF_CLK: R25.2 U1.46 | length 1343.3
  Top Layer w6: U1.46@-3415.31,-3268.98 -3221.2,-3268.98 -3187.81,-3235.59 v1(-3146.81,-3235.59) ; v1@-3151.65,-3240.43 ccw(c-3163.33,-3252.11) -3163.33,-3235.59 ccw(c-3163.33,-3219.07) v1@-3151.65,-3230.75 ; v1@-2935.65,-3230.75 ccw(c-2947.33,-3219.07) -2930.81,-3219.07 ccw(c-2914.29,-3219.07) v1@-2925.97,-3230.75 ; v1(-2930.81,-3235.59) -2930.81,-2749.59 -2916.81,-2735.59 R25.2@-2785.27,-2735.59 ; R25.2@-2799.04,-2747.39 ccw(c-2827.52,-2775.87) -2827.52,-2735.59 ccw(c-2827.52,-2695.31) R25.2@-2799.04,-2723.79 ; R25.2@-2794.8,-2743.15 ccw(c-2813.04,-2761.39) -2813.04,-2735.59 ccw(c-2813.04,-2709.79) R25.2@-2794.8,-2728.03
  Bottom Layer w6: v1(-3146.81,-3235.59) v1(-2930.81,-3235.59) ; v1@-3141.97,-3240.43 cw(c-3130.29,-3252.11) -3130.29,-3235.59 cw(c-3130.29,-3219.07) v1@-3141.97,-3230.75 ; v1@-2935.65,-3240.43 ccw(c-2947.33,-3252.11) -2947.33,-3235.59 ccw(c-2947.33,-3219.07) v1@-2935.65,-3230.75
MODIF_POWER: R32.2 R33.2 U1.45 | length 1485.6
  Top Layer w6: U1.45@-3415.31,-3284.72 -3217.94,-3284.72 -3194.81,-3261.59 v1(-3173.81,-3261.59) ; v1@-3178.65,-3266.43 ccw(c-3190.33,-3278.11) -3190.33,-3261.59 ccw(c-3190.33,-3245.07) v1@-3178.65,-3256.75 ; v1(-2971.81,-3261.59) -2607.81,-3261.59 -2581.81,-3235.59 R33.2@-2485.27,-3235.59 R32.2@-2485.27,-3115.59 ; v1@-2966.97,-3266.43 cw(c-2955.29,-3278.11) -2955.29,-3261.59 cw(c-2955.29,-3245.07) v1@-2966.97,-3256.75 ; R33.2@-2499.04,-3247.39 ccw(c-2527.52,-3275.87) -2527.52,-3235.59 ccw(c-2527.52,-3195.31) R33.2@-2499.04,-3223.79 ; R33.2@-2497.07,-3223.79 ccw(c-2525.56,-3195.31) -2485.27,-3195.31 ccw(c-2444.99,-3195.31) R33.2@-2473.48,-3223.79 ; R32.2@-2497.07,-3127.39 cw(c-2525.56,-3155.87) -2485.27,-3155.87 cw(c-2444.99,-3155.87) R32.2@-2473.48,-3127.39 ; R33.2@-2494.8,-3243.15 ccw(c-2513.04,-3261.39) -2513.04,-3235.59 ccw(c-2513.04,-3209.79) R33.2@-2494.8,-3228.03 ; R33.2@-2492.83,-3228.03 ccw(c-2511.07,-3209.79) -2485.27,-3209.79 ccw(c-2459.48,-3209.79) R33.2@-2477.72,-3228.03 ; R32.2@-2492.83,-3123.15 cw(c-2511.07,-3141.39) -2485.27,-3141.39 cw(c-2459.48,-3141.39) R32.2@-2477.72,-3123.15
  Bottom Layer w6: v1(-3173.81,-3261.59) v1(-2971.81,-3261.59) ; v1@-3168.97,-3266.43 cw(c-3157.29,-3278.11) -3157.29,-3261.59 cw(c-3157.29,-3245.07) v1@-3168.97,-3256.75 ; v1@-2976.65,-3266.43 ccw(c-2988.33,-3278.11) -2988.33,-3261.59 ccw(c-2988.33,-3245.07) v1@-2976.65,-3256.75
MODIF_SEL: R34.2 U1.44 | length 1547.6
  Top Layer w6: U1.44@-3415.31,-3300.47 -3209.81,-3300.47 -3200.93,-3291.59 v1(-3154.81,-3291.59) ; v1@-3159.65,-3296.43 ccw(c-3171.33,-3308.11) -3171.33,-3291.59 ccw(c-3171.33,-3275.07) v1@-3159.65,-3286.75 ; v1(-2996.81,-3291.59) -2261.81,-3291.59 -2245.27,-3275.05 R34.2@-2245.27,-3115.59 ; v1@-2991.97,-3296.43 cw(c-2980.29,-3308.11) -2980.29,-3291.59 cw(c-2980.29,-3275.07) v1@-2991.97,-3286.75 ; R34.2@-2257.07,-3127.39 cw(c-2285.56,-3155.87) -2245.27,-3155.87 cw(c-2204.99,-3155.87) R34.2@-2233.48,-3127.39 ; R34.2@-2252.83,-3123.15 cw(c-2271.07,-3141.39) -2245.27,-3141.39 cw(c-2219.48,-3141.39) R34.2@-2237.72,-3123.15
  Bottom Layer w6: v1(-3154.81,-3291.59) v1(-2996.81,-3291.59) ; v1@-3149.97,-3296.43 cw(c-3138.29,-3308.11) -3138.29,-3291.59 cw(c-3138.29,-3275.07) v1@-3149.97,-3286.75 ; v1@-3001.65,-3296.43 ccw(c-3013.33,-3308.11) -3013.33,-3291.59 ccw(c-3013.33,-3275.07) v1@-3001.65,-3286.75
NET3: MODIF.3 NFC.1 U1.63 U12.1 | length 8909.7
  Top Layer w6: U12.1@-4620,-2720 v1(-4548,-2720) ; U12.1@-4582.27,-2726.23 cw(c-4567.23,-2741.27) -4567.23,-2720 cw(c-4567.23,-2698.73) U12.1@-4582.27,-2713.77 ; v1@-4552.84,-2724.84 ccw(c-4564.52,-2736.52) -4564.52,-2720 ccw(c-4564.52,-2703.48) v1@-4552.84,-2715.16 ; v1(-4243,-2720) -4181,-2720 -4168,-2733 -4168,-2814 -4158,-2824 v1(-3681.81,-2824) ; v1@-4238.16,-2724.84 cw(c-4226.48,-2736.52) -4226.48,-2720 cw(c-4226.48,-2703.48) v1@-4238.16,-2715.16 ; v1@-3686.65,-2980.43 cw(c-3698.33,-2992.11) -3681.81,-2992.11 cw(c-3665.29,-2992.11) v1@-3676.97,-2980.43 ; v1@-3686.65,-2828.84 ccw(c-3698.33,-2840.52) -3698.33,-2824 ccw(c-3698.33,-2807.48) v1@-3686.65,-2819.16 ; v1(-3681.81,-2975.59) -3681.81,-3014.36 -3674.17,-3022 U1.63@-3674.17,-3199.09 ; v1@-3497.54,-2980.54 cw(c-3508.09,-2991.59) -3492.81,-2991.59 ; v1(-3492.81,-2975.59) -3492.81,-2991.59 ; v1@-3488.08,-2980.54 ccw(c-3477.53,-2991.59) -3492.81,-2991.59 ; NFC.1@-2348.88,-5182 ccw(c-2361.91,-5168.98) -2343.49,-5168.98 ccw(c-2325.07,-5168.98) NFC.1@-2338.09,-5182 ; v1@-2348.33,-5085.84 cw(c-2360.01,-5097.52) -2343.49,-5097.52 cw(c-2326.97,-5097.52) v1@-2338.65,-5085.84 ; NFC.1@-2343.49,-5210.23 v1(-2343.49,-5081) ; MODIF.3@-777.58,-3684.59 v1(-693,-3684.59) -651.81,-3684.59 -639.81,-3672.59 -639.81,-3349.68 -674.02,-3315.46 -3047.02,-3315.46 -3062.81,-3299.68 -3062.81,-3048.59 -3114.81,-2996.59 -3487.81,-2996.59 -3492.81,-2991.59 ; MODIF.3@-721.48,-3693.05 cw(c-701.06,-3713.47) -701.06,-3684.59 cw(c-701.06,-3655.71) MODIF.3@-721.48,-3676.13 ; v1@-697.84,-3689.43 ccw(c-709.52,-3701.11) -709.52,-3684.59 ccw(c-709.52,-3668.07) v1@-697.84,-3679.75 ; v1@-688.16,-3689.43 cw(c-676.48,-3701.11) -676.48,-3684.59 cw(c-676.48,-3668.07) v1@-688.16,-3679.75
  Bottom Layer w6: v1(-4548,-2720) v1(-4243,-2720) ; v1@-4543.16,-2724.84 cw(c-4531.48,-2736.52) -4531.48,-2720 cw(c-4531.48,-2703.48) v1@-4543.16,-2715.16 ; v1@-4247.84,-2724.84 ccw(c-4259.52,-2736.52) -4259.52,-2720 ccw(c-4259.52,-2703.48) v1@-4247.84,-2715.16 ; v1@-3686.65,-2970.75 ccw(c-3698.33,-2959.07) -3681.81,-2959.07 ccw(c-3665.29,-2959.07) -3676.97,-2970.75 ccw(c-3665.29,-2959.07) -3665.29,-2975.59 ccw(c-3665.29,-2992.11) v1@-3676.97,-2980.43 ; v1@-3686.65,-2828.84 cw(c-3698.33,-2840.52) -3681.81,-2840.52 cw(c-3665.29,-2840.52) v1@-3676.97,-2828.84 ; v1(-3681.81,-2824) v1(-3681.81,-2975.59) v1(-3492.81,-2975.59) ; v1@-3497.65,-2980.43 ccw(c-3509.33,-2992.11) -3509.33,-2975.59 ccw(c-3509.33,-2959.07) v1@-3497.65,-2970.75 ; v1@-2348.33,-5076.16 ccw(c-2360.01,-5064.48) -2343.49,-5064.48 ccw(c-2326.97,-5064.48) v1@-2338.65,-5076.16 ; v1(-2343.49,-5081) -2343.49,-5000.08 -2335,-4991.59 -708.59,-4991.59 -693,-4976 v1(-693,-3684.59) ; v1@-697.84,-3689.43 cw(c-709.52,-3701.11) -693,-3701.11 cw(c-676.48,-3701.11) v1@-688.16,-3689.43
NET4: MODIF.4 NFC.2 U1.57 U12.3 | length 9115.8
  Top Layer w6: v1@-4718.73,-2800.95 cw(c-4729.28,-2812) -4714,-2812 ; v1(-4714,-2796) -4714,-2812 ; v1@-4709.27,-2800.95 ccw(c-4698.72,-2812) -4714,-2812 ; U12.3@-4657.73,-2826.23 ccw(c-4672.77,-2841.27) -4672.77,-2820 ccw(c-4672.77,-2798.73) U12.3@-4657.73,-2813.77 ; U12.3@-4620,-2820 -4706,-2820 -4714,-2812 ; v1(-4249,-2769) -4189,-2769 -4180,-2778 -4180,-2847 -4169.41,-2857.59 v1(-3590.81,-2857.59) -3590.81,-2880.46 -3579.68,-2891.59 U1.57@-3579.68,-3199.09 ; v1@-4244.16,-2773.84 cw(c-4232.48,-2785.52) -4232.48,-2769 cw(c-4232.48,-2752.48) v1@-4244.16,-2764.16 ; v1@-3595.65,-2852.75 cw(c-3607.33,-2841.07) -3607.33,-2857.59 cw(c-3607.33,-2874.11) -3595.65,-2862.43 cw(c-3607.33,-2874.11) -3590.81,-2874.11 cw(c-3574.29,-2874.11) v1@-3585.97,-2862.43 ; v1@-3520.65,-2862.43 cw(c-3532.33,-2874.11) -3515.81,-2874.11 cw(c-3499.29,-2874.11) v1@-3510.97,-2862.43 ; v1@-3515.81,-2858.59 -3515.81,-3002.59 -3509.81,-3008.59 -3119.78,-3008.59 -3074.81,-3053.56 -3074.81,-3304.65 -3052,-3327.46 -679,-3327.46 -651.81,-3354.65 -651.81,-3620.59 v1(-665.81,-3634.59) MODIF.4@-777.58,-3634.59 ; NFC.2@-2299.64,-5182 ccw(c-2312.66,-5168.98) -2294.24,-5168.98 ccw(c-2275.82,-5168.98) NFC.2@-2288.84,-5182 ; v1@-2299.08,-5071.08 cw(c-2310.76,-5082.76) -2294.24,-5082.76 cw(c-2277.72,-5082.76) v1@-2289.4,-5071.08 ; NFC.2@-2294.24,-5210.23 v1(-2294.24,-5066.24) ; MODIF.4@-721.48,-3643.05 cw(c-701.06,-3663.47) -701.06,-3634.59 cw(c-701.06,-3605.71) MODIF.4@-721.48,-3626.13 ; v1@-670.65,-3639.43 ccw(c-682.33,-3651.11) -682.33,-3634.59 ccw(c-682.33,-3618.07) v1@-670.65,-3629.75 ; v1@-665.81,-3627.75 ccw(c-665.81,-3611.23) -654.13,-3622.91 ccw(c-642.45,-3634.59) v1@-658.97,-3634.59
  Bottom Layer w6: v1(-4714,-2796) -4257,-2796 -4249,-2788 v1(-4249,-2769) ; v1@-4709.16,-2800.84 cw(c-4697.48,-2812.52) -4697.48,-2796 cw(c-4697.48,-2779.48) v1@-4709.16,-2791.16 ; v1@-4253.84,-2773.84 cw(c-4265.52,-2785.52) -4249,-2785.52 cw(c-4232.48,-2785.52) v1@-4244.16,-2773.84 ; v1(-3590.81,-2857.59) v1(-3515.81,-2857.59) ; v1@-3585.97,-2862.43 cw(c-3574.29,-2874.11) -3574.29,-2857.59 cw(c-3574.29,-2841.07) v1@-3585.97,-2852.75 ; v1@-3520.65,-2862.43 ccw(c-3532.33,-2874.11) -3532.33,-2857.59 ccw(c-3532.33,-2841.07) v1@-3520.65,-2852.75 ; v1@-2299.08,-5061.4 ccw(c-2310.76,-5049.72) -2294.24,-5049.72 ccw(c-2277.72,-5049.72) v1@-2289.4,-5061.4 ; v1(-2294.24,-5066.24) -2294.24,-5010.83 -2287,-5003.59 -681.59,-5003.59 -665.81,-4987.81 v1(-665.81,-3634.59) ; v1@-670.65,-3639.43 cw(c-682.33,-3651.11) -665.81,-3651.11 cw(c-649.29,-3651.11) v1@-660.97,-3639.43
NET5: MODIF.5 NFC.3 U1.54 | length 7126.5
  Top Layer w6: U1.54@-3532.44,-3199.09 -3532.44,-3035.22 -3517.81,-3020.59 -3124.75,-3020.59 -3086.81,-3058.53 -3086.81,-3309.62 -3056.97,-3339.46 -683.97,-3339.46 -663.81,-3359.62 -663.81,-3574.59 -673.81,-3584.59 v1(-694,-3584.59) MODIF.5@-777.58,-3584.59 ; NFC.3@-2250.39,-5182 ccw(c-2263.41,-5168.98) -2244.99,-5168.98 ccw(c-2226.57,-5168.98) NFC.3@-2239.59,-5182 ; v1@-2249.83,-5102.85 cw(c-2261.51,-5114.53) -2244.99,-5114.53 cw(c-2228.47,-5114.53) v1@-2240.15,-5102.85 ; NFC.3@-2244.99,-5210.23 v1(-2244.99,-5098.01) ; MODIF.5@-721.48,-3593.05 cw(c-701.06,-3613.47) -701.06,-3584.59 cw(c-701.06,-3555.71) MODIF.5@-721.48,-3576.13 ; v1@-698.84,-3589.43 ccw(c-710.52,-3601.11) -710.52,-3584.59 ccw(c-710.52,-3568.07) v1@-698.84,-3579.75 ; v1@-689.16,-3589.43 cw(c-677.48,-3601.11) -677.48,-3584.59 cw(c-677.48,-3568.07) v1@-689.16,-3579.75
  Bottom Layer w6: v1@-2249.83,-5093.17 ccw(c-2261.51,-5081.49) -2244.99,-5081.49 ccw(c-2228.47,-5081.49) v1@-2240.15,-5093.17 ; v1(-2244.99,-5098.01) -2244.99,-5029.58 -2231,-5015.59 -653.59,-5015.59 -640,-5002 -640,-3593 -648.41,-3584.59 v1(-694,-3584.59) ; v1@-689.16,-3589.43 cw(c-677.48,-3601.11) -677.48,-3584.59 cw(c-677.48,-3568.07) v1@-689.16,-3579.75
NET6: MODIF.6 NFC.4 U1.53 | length 7005.6
  Top Layer w6: U1.53@-3516.69,-3199.09 -3516.69,-3044.47 -3504.81,-3032.59 -3129.72,-3032.59 -3098.81,-3063.5 -3098.81,-3314.59 -3061.94,-3351.46 -688.94,-3351.46 -675.81,-3364.59 -675.81,-3523.59 v1(-686.81,-3534.59) MODIF.6@-777.58,-3534.59 ; NFC.4@-2201.14,-5182 ccw(c-2214.16,-5168.98) -2195.74,-5168.98 ccw(c-2177.32,-5168.98) NFC.4@-2190.35,-5182 ; v1@-2200.58,-5077.58 cw(c-2212.26,-5089.26) -2195.74,-5089.26 cw(c-2179.22,-5089.26) v1@-2190.9,-5077.58 ; NFC.4@-2195.74,-5210.23 v1(-2195.74,-5072.74) ; MODIF.6@-721.48,-3543.05 cw(c-701.06,-3563.47) -701.06,-3534.59 cw(c-701.06,-3505.71) MODIF.6@-721.48,-3526.13 ; v1@-691.65,-3539.43 ccw(c-703.33,-3551.11) -703.33,-3534.59 ccw(c-703.33,-3518.07) v1@-691.65,-3529.75
  Bottom Layer w6: v1@-2200.58,-5067.9 ccw(c-2212.26,-5056.22) -2195.74,-5056.22 ccw(c-2179.22,-5056.22) v1@-2190.9,-5067.9 ; v1(-2195.74,-5072.74) -2195.74,-5039.33 -2184,-5027.59 -648.62,-5027.59 -628,-5006.97 -628,-3545 -638.41,-3534.59 v1(-686.81,-3534.59) ; v1@-681.97,-3539.43 cw(c-670.29,-3551.11) -670.29,-3534.59 cw(c-670.29,-3518.07) v1@-681.97,-3529.75
NET7: MODIF.7 NFC.5 U1.40 | length 6513.9
  Top Layer w6: U1.40@-3415.31,-3363.46 -3151.76,-3363.46 -3139,-3376.22 -3139,-3430 -3127.41,-3441.59 v1(-2651.81,-3441.59) ; v1@-2656.65,-3446.43 ccw(c-2668.33,-3458.11) -2668.33,-3441.59 ccw(c-2668.33,-3425.07) v1@-2656.65,-3436.75 ; NFC.5@-2151.93,-5181.77 ccw(c-2164.96,-5168.75) -2146.54,-5168.75 ccw(c-2128.12,-5168.75) NFC.5@-2141.14,-5181.77 ; v1@-2151.37,-5131.3 cw(c-2163.06,-5142.98) -2146.54,-5142.98 cw(c-2130.02,-5142.98) v1@-2141.7,-5131.3 ; NFC.5@-2146.54,-5210 v1(-2146.54,-5126.46) ; v1(-1044,-3484.59) v1(-876,-3484.59) MODIF.7@-777.58,-3484.59 ; v1@-1039.16,-3489.43 cw(c-1027.48,-3501.11) -1027.48,-3484.59 cw(c-1027.48,-3468.07) v1@-1039.16,-3479.75 ; v1@-880.84,-3489.43 ccw(c-892.52,-3501.11) -892.52,-3484.59 ccw(c-892.52,-3468.07) v1@-880.84,-3479.75 ; v1@-871.16,-3489.43 cw(c-859.48,-3501.11) -859.48,-3484.59 cw(c-859.48,-3468.07) v1@-871.16,-3479.75 ; MODIF.7@-833.67,-3493.05 ccw(c-854.09,-3513.47) -854.09,-3484.59 ccw(c-854.09,-3455.71) MODIF.7@-833.67,-3476.13
  Bottom Layer w6: v1(-2651.81,-3441.59) -1628.41,-3441.59 -1585.41,-3484.59 v1(-1044,-3484.59) ; v1@-2646.97,-3446.43 cw(c-2635.29,-3458.11) -2635.29,-3441.59 cw(c-2635.29,-3425.07) v1@-2646.97,-3436.75 ; v1@-2151.37,-5121.63 ccw(c-2163.06,-5109.94) -2146.54,-5109.94 ccw(c-2130.02,-5109.94) v1@-2141.7,-5121.63 ; v1(-2146.54,-5126.46) -2146.54,-5050.54 -2135.59,-5039.59 -643.65,-5039.59 -616,-5011.94 -616,-3496 -627.41,-3484.59 v1(-876,-3484.59) ; v1@-1048.84,-3489.43 ccw(c-1060.52,-3501.11) -1060.52,-3484.59 ccw(c-1060.52,-3468.07) v1@-1048.84,-3479.75 ; v1@-871.16,-3489.43 cw(c-859.48,-3501.11) -859.48,-3484.59 cw(c-859.48,-3468.07) v1@-871.16,-3479.75
NetBT1_1: BT1.1 U4.8 | length 1828.3
  Top Layer w6: U4.8@-4563.55,-4734.36 ccw(c-4578.59,-4719.32) -4557.32,-4719.32 ccw(c-4536.05,-4719.32) U4.8@-4551.09,-4734.36 ; BT1.1@-4558.47,-4282.56 cw(c-4670.96,-4395.06) -4511.87,-4395.06 cw(c-4352.78,-4395.06) BT1.1@-4465.28,-4282.56 ; U4.8@-4557.32,-4740.59 -4557.32,-4480.1 -4511.87,-4434.65 BT1.1@-4511.87,-4235.97 ; BT1.1@-4554.23,-4278.32 cw(c-4656.48,-4380.57) -4511.87,-4380.57 cw(c-4367.27,-4380.57) BT1.1@-4469.52,-4278.32 ; BT1.1@-4549.99,-4274.08 cw(c-4641.99,-4366.09) -4511.87,-4366.09 cw(c-4381.75,-4366.09) BT1.1@-4473.76,-4274.08 ; BT1.1@-4545.74,-4269.84 cw(c-4627.51,-4351.6) -4511.87,-4351.6 cw(c-4396.24,-4351.6) BT1.1@-4478.01,-4269.84 ; BT1.1@-4541.5,-4265.59 cw(c-4613.02,-4337.12) -4511.87,-4337.12 cw(c-4410.72,-4337.12) BT1.1@-4482.25,-4265.59 ; BT1.1@-4537.26,-4261.35 cw(c-4598.54,-4322.63) -4511.87,-4322.63 cw(c-4425.21,-4322.63) BT1.1@-4486.49,-4261.35 ; BT1.1@-4533.01,-4257.11 cw(c-4584.05,-4308.15) -4511.87,-4308.15 cw(c-4439.7,-4308.15) BT1.1@-4490.73,-4257.11
NetC3_1: C3.1 U1.35 | length 1272.2
  Top Layer w6: U1.35@-3415.31,-3442.2 -3243.2,-3442.2 -3234.81,-3450.59 -3234.81,-3522.59 -3226.27,-3531.13 v1(-2640.27,-3531.13) ; v1@-2645.11,-3535.96 ccw(c-2656.79,-3547.64) -2656.79,-3531.13 ccw(c-2656.79,-3514.61) v1@-2645.11,-3526.29 ; C3.1@-2497.07,-3487.39 cw(c-2525.56,-3515.87) -2485.27,-3515.87 cw(c-2444.99,-3515.87) C3.1@-2473.48,-3487.39 ; C3.1@-2492.83,-3483.15 cw(c-2511.07,-3501.39) -2485.27,-3501.39 cw(c-2459.48,-3501.39) C3.1@-2477.72,-3483.15 ; v1@-2490.11,-3526.29 ccw(c-2501.79,-3514.61) -2485.27,-3514.61 ccw(c-2468.76,-3514.61) v1@-2480.44,-3526.29 ; v1(-2485.27,-3531.13) C3.1@-2485.27,-3475.59
  Bottom Layer w6: v1(-2640.27,-3531.13) v1(-2485.27,-3531.13) ; v1@-2635.44,-3535.96 cw(c-2623.76,-3547.64) -2623.76,-3531.13 cw(c-2623.76,-3514.61) v1@-2635.44,-3526.29 ; v1@-2490.11,-3535.96 ccw(c-2501.79,-3547.64) -2501.79,-3531.13 ccw(c-2501.79,-3514.61) v1@-2490.11,-3526.29
NetC12_1: C12.1 U6.4 | length 560.9
  Top Layer w6: U6.4@-4190.49,-2230.31 -4050.5,-2230.31 -4036.81,-2244 -4036.81,-2427.78 -4023,-2441.59 C12.1@-3958.27,-2441.59 ; U6.4@-4167.23,-2235.85 cw(c-4153.87,-2249.21) -4153.87,-2230.31 cw(c-4153.87,-2211.42) U6.4@-4167.23,-2224.78 ; C12.1@-3972.04,-2453.39 ccw(c-4000.52,-2481.87) -4000.52,-2441.59 ccw(c-4000.52,-2401.31) C12.1@-3972.04,-2429.79 ; C12.1@-3967.8,-2449.15 ccw(c-3986.04,-2467.39) -3986.04,-2441.59 ccw(c-3986.04,-2415.79) C12.1@-3967.8,-2434.03
NetC16_1: C16.1 U7.8 | length 495.7
  Top Layer w6: C16.1@-4136.07,-1120.39 cw(c-4164.56,-1148.87) -4124.27,-1148.87 cw(c-4083.99,-1148.87) C16.1@-4112.48,-1120.39 ; C16.1@-4131.83,-1116.15 cw(c-4150.07,-1134.39) -4124.27,-1134.39 cw(c-4098.48,-1134.39) C16.1@-4116.72,-1116.15 ; C16.1@-4124.27,-1108.59 -4124.27,-1179.59 -4110.27,-1193.59 -4016.81,-1193.59 -4004.51,-1205.89 U7.8@-4004.51,-1362.01 ; U7.8@-4010.87,-1355.64 ccw(c-4026.24,-1340.28) -4004.51,-1340.28 ccw(c-3982.78,-1340.28) U7.8@-3998.15,-1355.64